# Altium PCB tx_board.PcbDoc
Units mil, origin at the board's own origin, x right, y up, seen from the top; angles counter-clockwise.
Board outline 1968.5 x 1968.5 mil, 2 copper layers (Top Layer, Bottom Layer); 9 components, 7 nets, 48 pads, 0 vias.
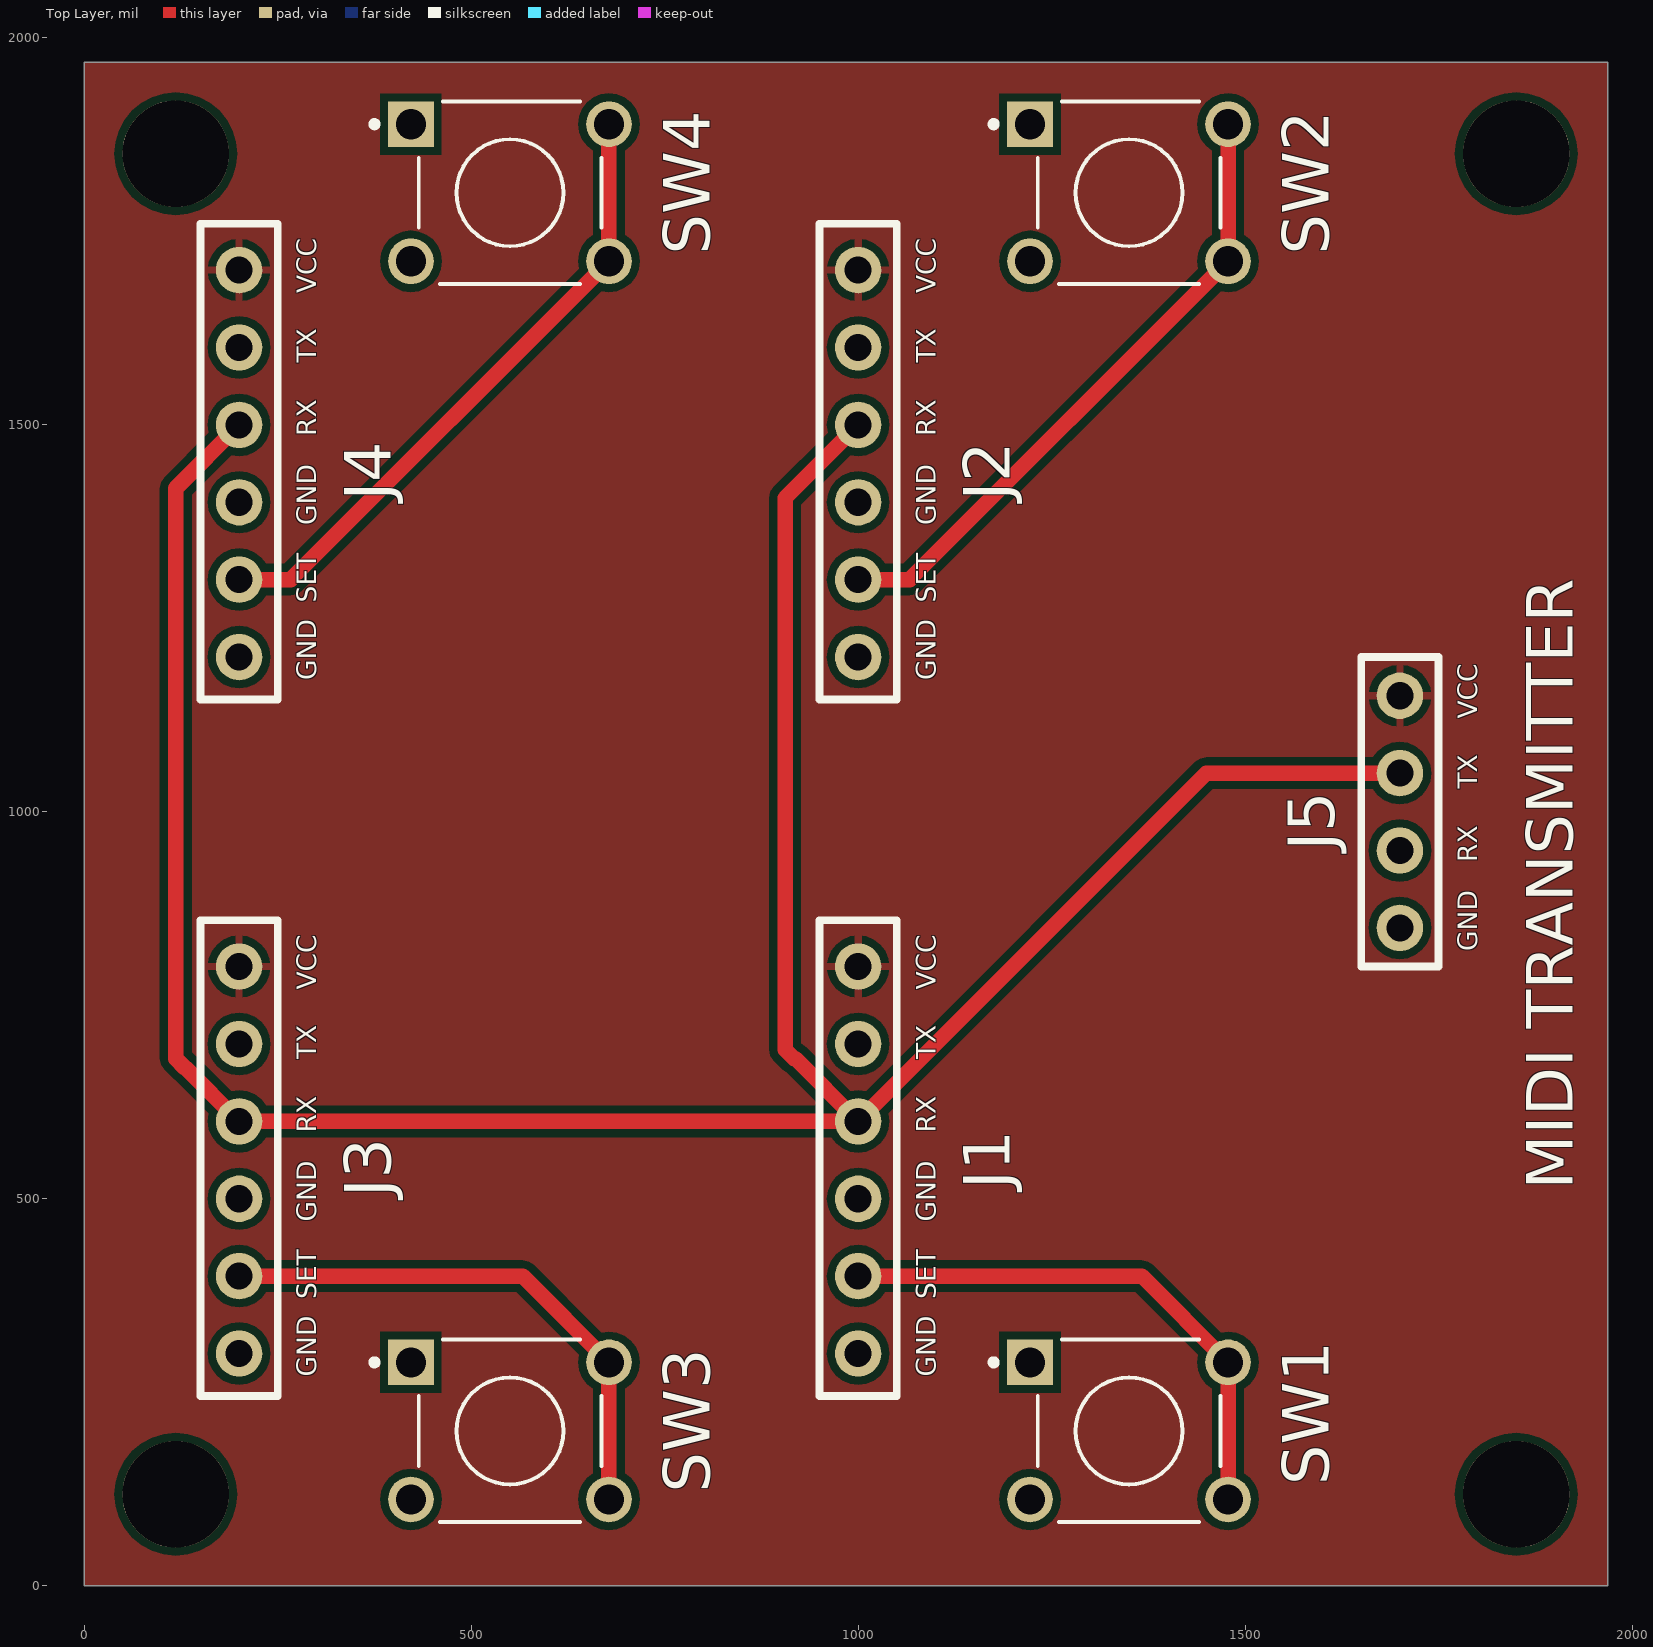
[diagram p0: Top Layer view]
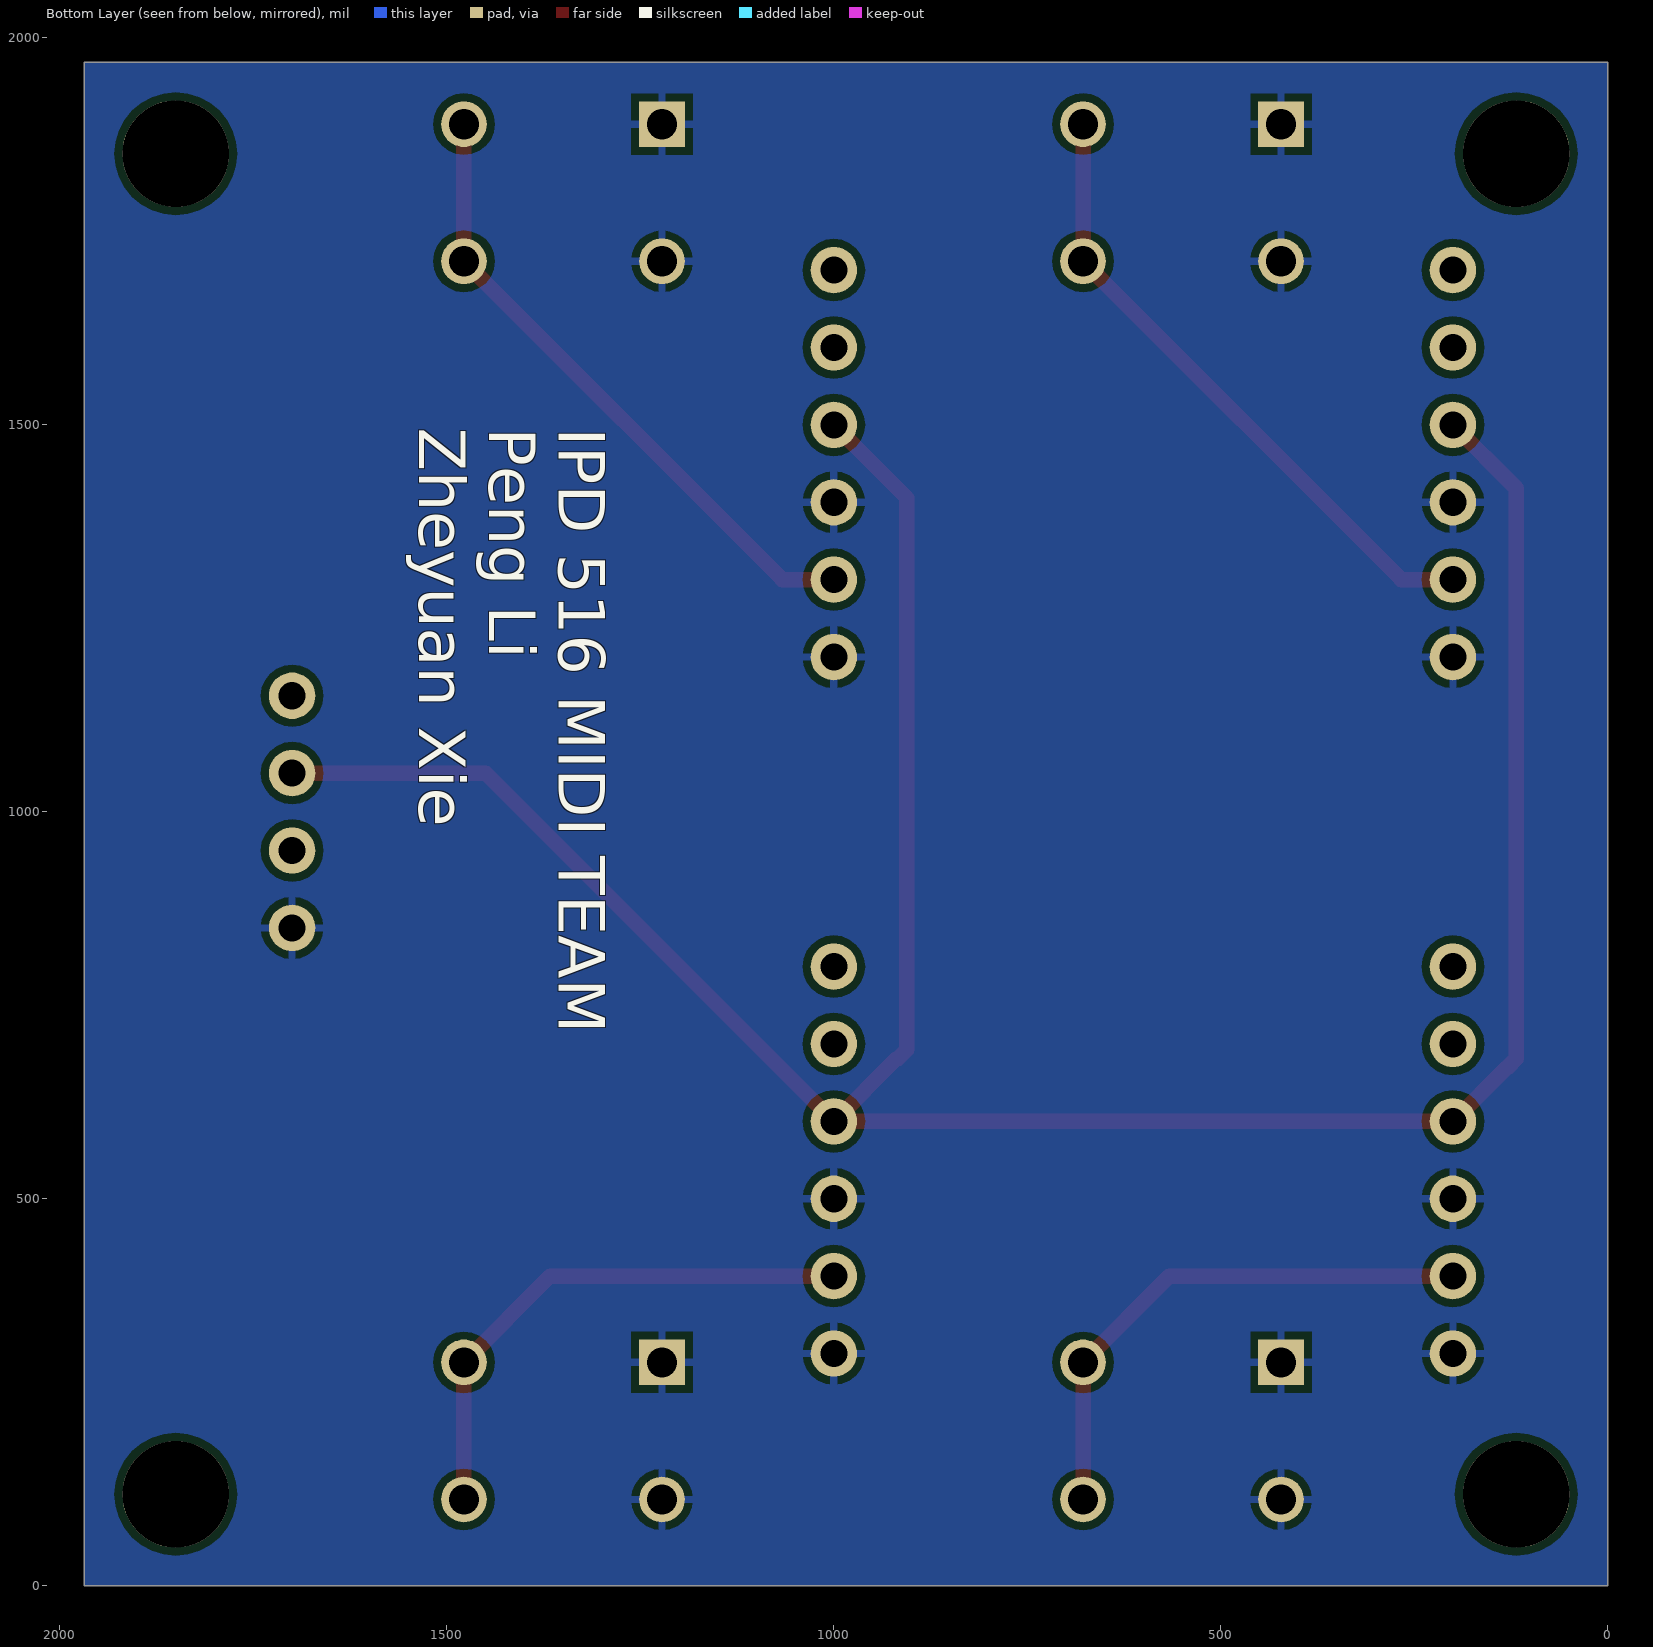
[diagram p1: Bottom Layer view, seen from below]
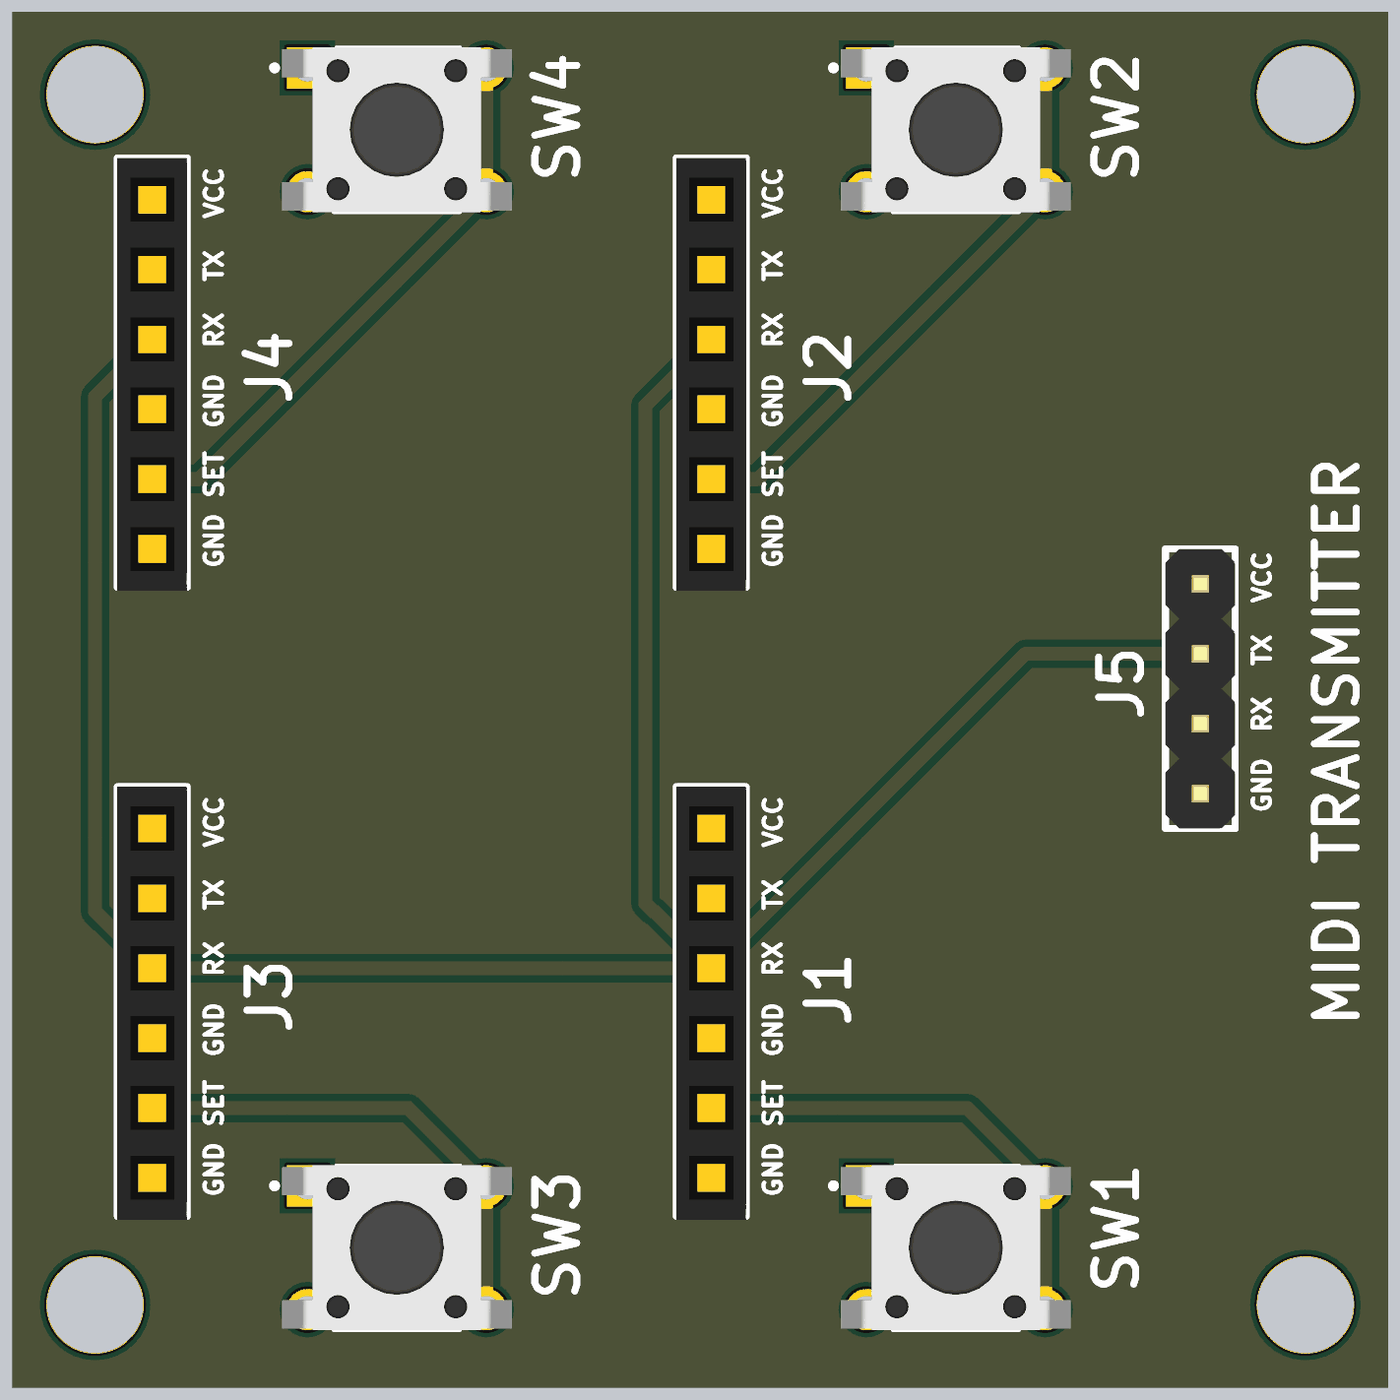
[diagram p2: 3D render of the assembled board from above, using the file's embedded part models]

## Layer stack, top to bottom
Top Solder: solder mask 0.4, Solder Resist, Dk 3.5
Top Layer: signal copper 1.4
Dielectric 1: dielectric 12.6, FR-4, Dk 4.8
Bottom Layer: signal copper 1.4
Bottom Solder: solder mask 0.4, Solder Resist, Dk 3.5

## Board outline
0,0 0,1968.5 1968.5,1968.5 1968.5,0

## Design rules (kind name [scope] priority, off if disabled: settings)
Clearance [All] p1: gap=10 ignorepadtopadclearanceinfootprint=FALSE except(0: Arc-Hole Track-Hole SMDPad-Hole THPad-Hole Via-Hole Fill-Hole Poly-Hole Region-Hole Text-Hole)
PolygonConnect [All] p1: connectstyle=Relief reliefconductorwidth=10 reliefentries=4 polygonreliefangle="90 Angle" airgapwidth=10
RoutingVias [All] p1: holewidth=28 width=50 viastyle="Through Hole" minholewidth=28 minwidth=50 maxholewidth=28 maxwidth=50
SolderMaskExpansion [All] p1: expansion=4
Width [All] p1: maxlimit=25 minlimit=10 preferedwidth=20
30 further rules are at their usual default settings.

## Components (designator, comment, footprint, x,y, rotation, side; value= is the part's Value field where it differs from the comment)
J1 "dl20" DL20 1000,800 r90 top
J2 "dl20" DL20 1000,1700 r90 top
J3 "dl20" DL20 200,800 r90 top
J4 "dl20" DL20 200,1700 r90 top
J5 "usb_to_ttl" USB_TO_TTL 1700,1150 r90 top
SW1 "1825910-6" *SW_1825910-6-4 1350,200 r0 top
SW2 "1825910-6" *SW_1825910-6-4 1350,1800 r0 top
SW3 "1825910-6" *SW_1825910-6-4 550,200 r0 top
SW4 "1825910-6" *SW_1825910-6-4 550,1800 r0 top

## Footprints (in the part's own frame and the unit in brackets; to place one, negate y for a bottom-side part, rotate by r counter-clockwise, add the part's x,y. Pads: shape width x height; smd on the part's side, far side on the other; paste and mask are expansions set on the pad)
*SW_1825910-6-4 [mm]
  rect 1.498x1.498 hole 0.99: 1(-3.25,2.25)
  round 1.498 hole 0.99: 2(-3.25,-2.25) 3(3.25,2.25) 4(3.25,-2.25)
  silkscreen extent -4.54,-3 3,3, body extent -4.18,-3 4.18,3, height 8.61
DL20 [mil]
  round 60 hole 35: 1(0,0) 2(-100,0) 3(-200,0) 4(-300,0) 5(-400,0) 6(-500,0)
  silkscreen extent -555,-50 60,50, body extent -560,-50 60,50, height 335
USB_TO_TTL [mil]
  round 60 hole 35: 1(0,0) 2(-100,0) 3(-200,0) 4(-300,0)
  silkscreen extent -350,-50 50,50, body extent -350,-50 50,50, height 336

## Part data
SW1 SW2 SW3 SW4: "FSM4JH=6MM TACT SWITCH, HIGH TEMP", Contact_Current_Rating="50 mA", Package=None, Configuration_Pole-Throw="Single Pole - Single Throw", Digi-Key_Part_Number=450-1650-ND, Digi-Key_Purchase_URL=https://www.digikey.com/product-detail/en/te-connectivity-alcoswitch-switches/1825910-6/450-1650-ND/1632536?utm_source=snapeda&utm_medium=aggregator&utm_campaign=symbol, EU_RoHS_Compliance=Compliant, MF="TE Connectivity", MP=1825910-6, SnapEDA_Link=https://www.snapeda.com/parts/1825910-6/TE%20Connectivity%20ALCOSWITCH%20Switches/view-part/?ref=snap, TE_purchase_URL=https://www.te.com/usa-en/product-1825910-6.html?te_bu=Cor&te_type=disp&te_campaign=seda_glo_cor-seda-global-disp-prtnr-fy19-seda-model-bom-cta_sma-317_1&elqCampaignId=32493

## Free pads (board coordinates)
  round 137.8 hole 137.8: 2(118.11,118.11) 2(118.11,1850.39) 2(1850.39,1850.39) 3(1850.39,118.11)

## Nets (pads, with @x,y where several pads share a name; then routed paths per layer and width w, separated by ;. In a path a pad name is that pad's centre, name@x,y a point inside that pad or via, vN(x,y) a via of type N, cw(c..) or ccw(c..) an arc to the next point about the centre after c; other vN are vias at no path point)
GND: J1.4 J1.6 J2.4 J2.6 J3.4 J3.6 J4.4 J4.6 J5.4 SW1.1 SW1.2 SW2.1 SW2.2 SW3.1 SW3.2 SW4.1 SW4.2
NetJ1_3: J1.3 J2.3 J3.3 J4.3 J5.2 | length 3634.1
  Top Layer w20: J4.3 118.11,1418.11 118.11,681.01 129.83,669.29 130.71,669.29 J3.3 J1.3 ; J2.3 905.51,1405.51 905.51,692.72 917.23,681.01 918.99,681.01 J1.3 ; J5.2 1450,1050 J1.3
NetJ1_5: J1.5 SW1.3 SW1.4 | length 701.3
  Top Layer w20: J1.5 1366.54,400 SW1.3 SW1.4
NetJ2_5: J2.5 SW2.3 SW2.4 | length 825.5
  Top Layer w20: J2.5 1066.54,1300 SW2.4 SW2.3
NetJ3_5: J3.5 SW3.3 SW3.4 | length 701.3
  Top Layer w20: J3.5 566.54,400 SW3.3 SW3.4
NetJ4_5: J4.5 SW4.3 SW4.4 | length 825.5
  Top Layer w20: J4.5 266.54,1300 SW4.4 SW4.3
VCC: J1.1 J2.1 J3.1 J4.1 J5.1
pads on no net: J1.2 J2.2 J3.2 J4.2 J5.3

## Polygon pours and split planes (outlines as drawn)
VCC on Top Layer "Top Layer-VCC" (solid, pour order 4): 0,0 1968.5,0 1968.5,1968.5 0,1968.5
GND on Bottom Layer "GND_L02_P006" (solid, pour order 6): 0,0 1968.5,0 1968.5,1968.5 0,1968.5

## Silkscreen, mask and mechanical layers (free items; w line width, h text height)
Top Overlay:
  text "MIDI TRANSMITTER" at 1923.64,511.81 h60 r90
Bottom Overlay:
  text "IPD 516 MIDI TEAM / Peng Li / Zheyuan Xie" at 1535.43,1496.06 h60 r90

## Text inside footprints (layer, text, board x,y; h text height)
J1: Top Overlay "VCC" at 1100,770 h25 r90; Top Overlay "TX" at 1100,680 h25 r90; Top Overlay "RX" at 1100,585 h25 r90; Top Overlay "GND" at 1100,470 h25 r90; Top Overlay "SET" at 1100,370 h25 r90; Top Overlay "GND" at 1100,270 h25 r90
J2: Top Overlay "VCC" at 1100,1670 h25 r90; Top Overlay "TX" at 1100,1580 h25 r90; Top Overlay "RX" at 1100,1485 h25 r90; Top Overlay "GND" at 1100,1370 h25 r90; Top Overlay "SET" at 1100,1270 h25 r90; Top Overlay "GND" at 1100,1170 h25 r90
J3: Top Overlay "VCC" at 300,770 h25 r90; Top Overlay "TX" at 300,680 h25 r90; Top Overlay "RX" at 300,585 h25 r90; Top Overlay "GND" at 300,470 h25 r90; Top Overlay "SET" at 300,370 h25 r90; Top Overlay "GND" at 300,270 h25 r90
J4: Top Overlay "VCC" at 300,1670 h25 r90; Top Overlay "TX" at 300,1580 h25 r90; Top Overlay "RX" at 300,1485 h25 r90; Top Overlay "GND" at 300,1370 h25 r90; Top Overlay "SET" at 300,1270 h25 r90; Top Overlay "GND" at 300,1170 h25 r90
J5: Top Overlay "VCC" at 1800,1120 h25 r90; Top Overlay "TX" at 1800,1030 h25 r90; Top Overlay "RX" at 1800,935 h25 r90; Top Overlay "GND" at 1800,820 h25 r90